# Altium PCB FRONT_v1.PcbDoc (part 5 of 5)
Units mm, origin at the board's own origin, x right, y up, seen from the top; angles counter-clockwise.
Board outline 100 x 68 mm, 4 copper layers (Top Layer, Layer 1, Layer 2, Bottom Layer), stack 1.484 mm thick; 320 components, 276 nets, 1432 pads, 1421 vias.
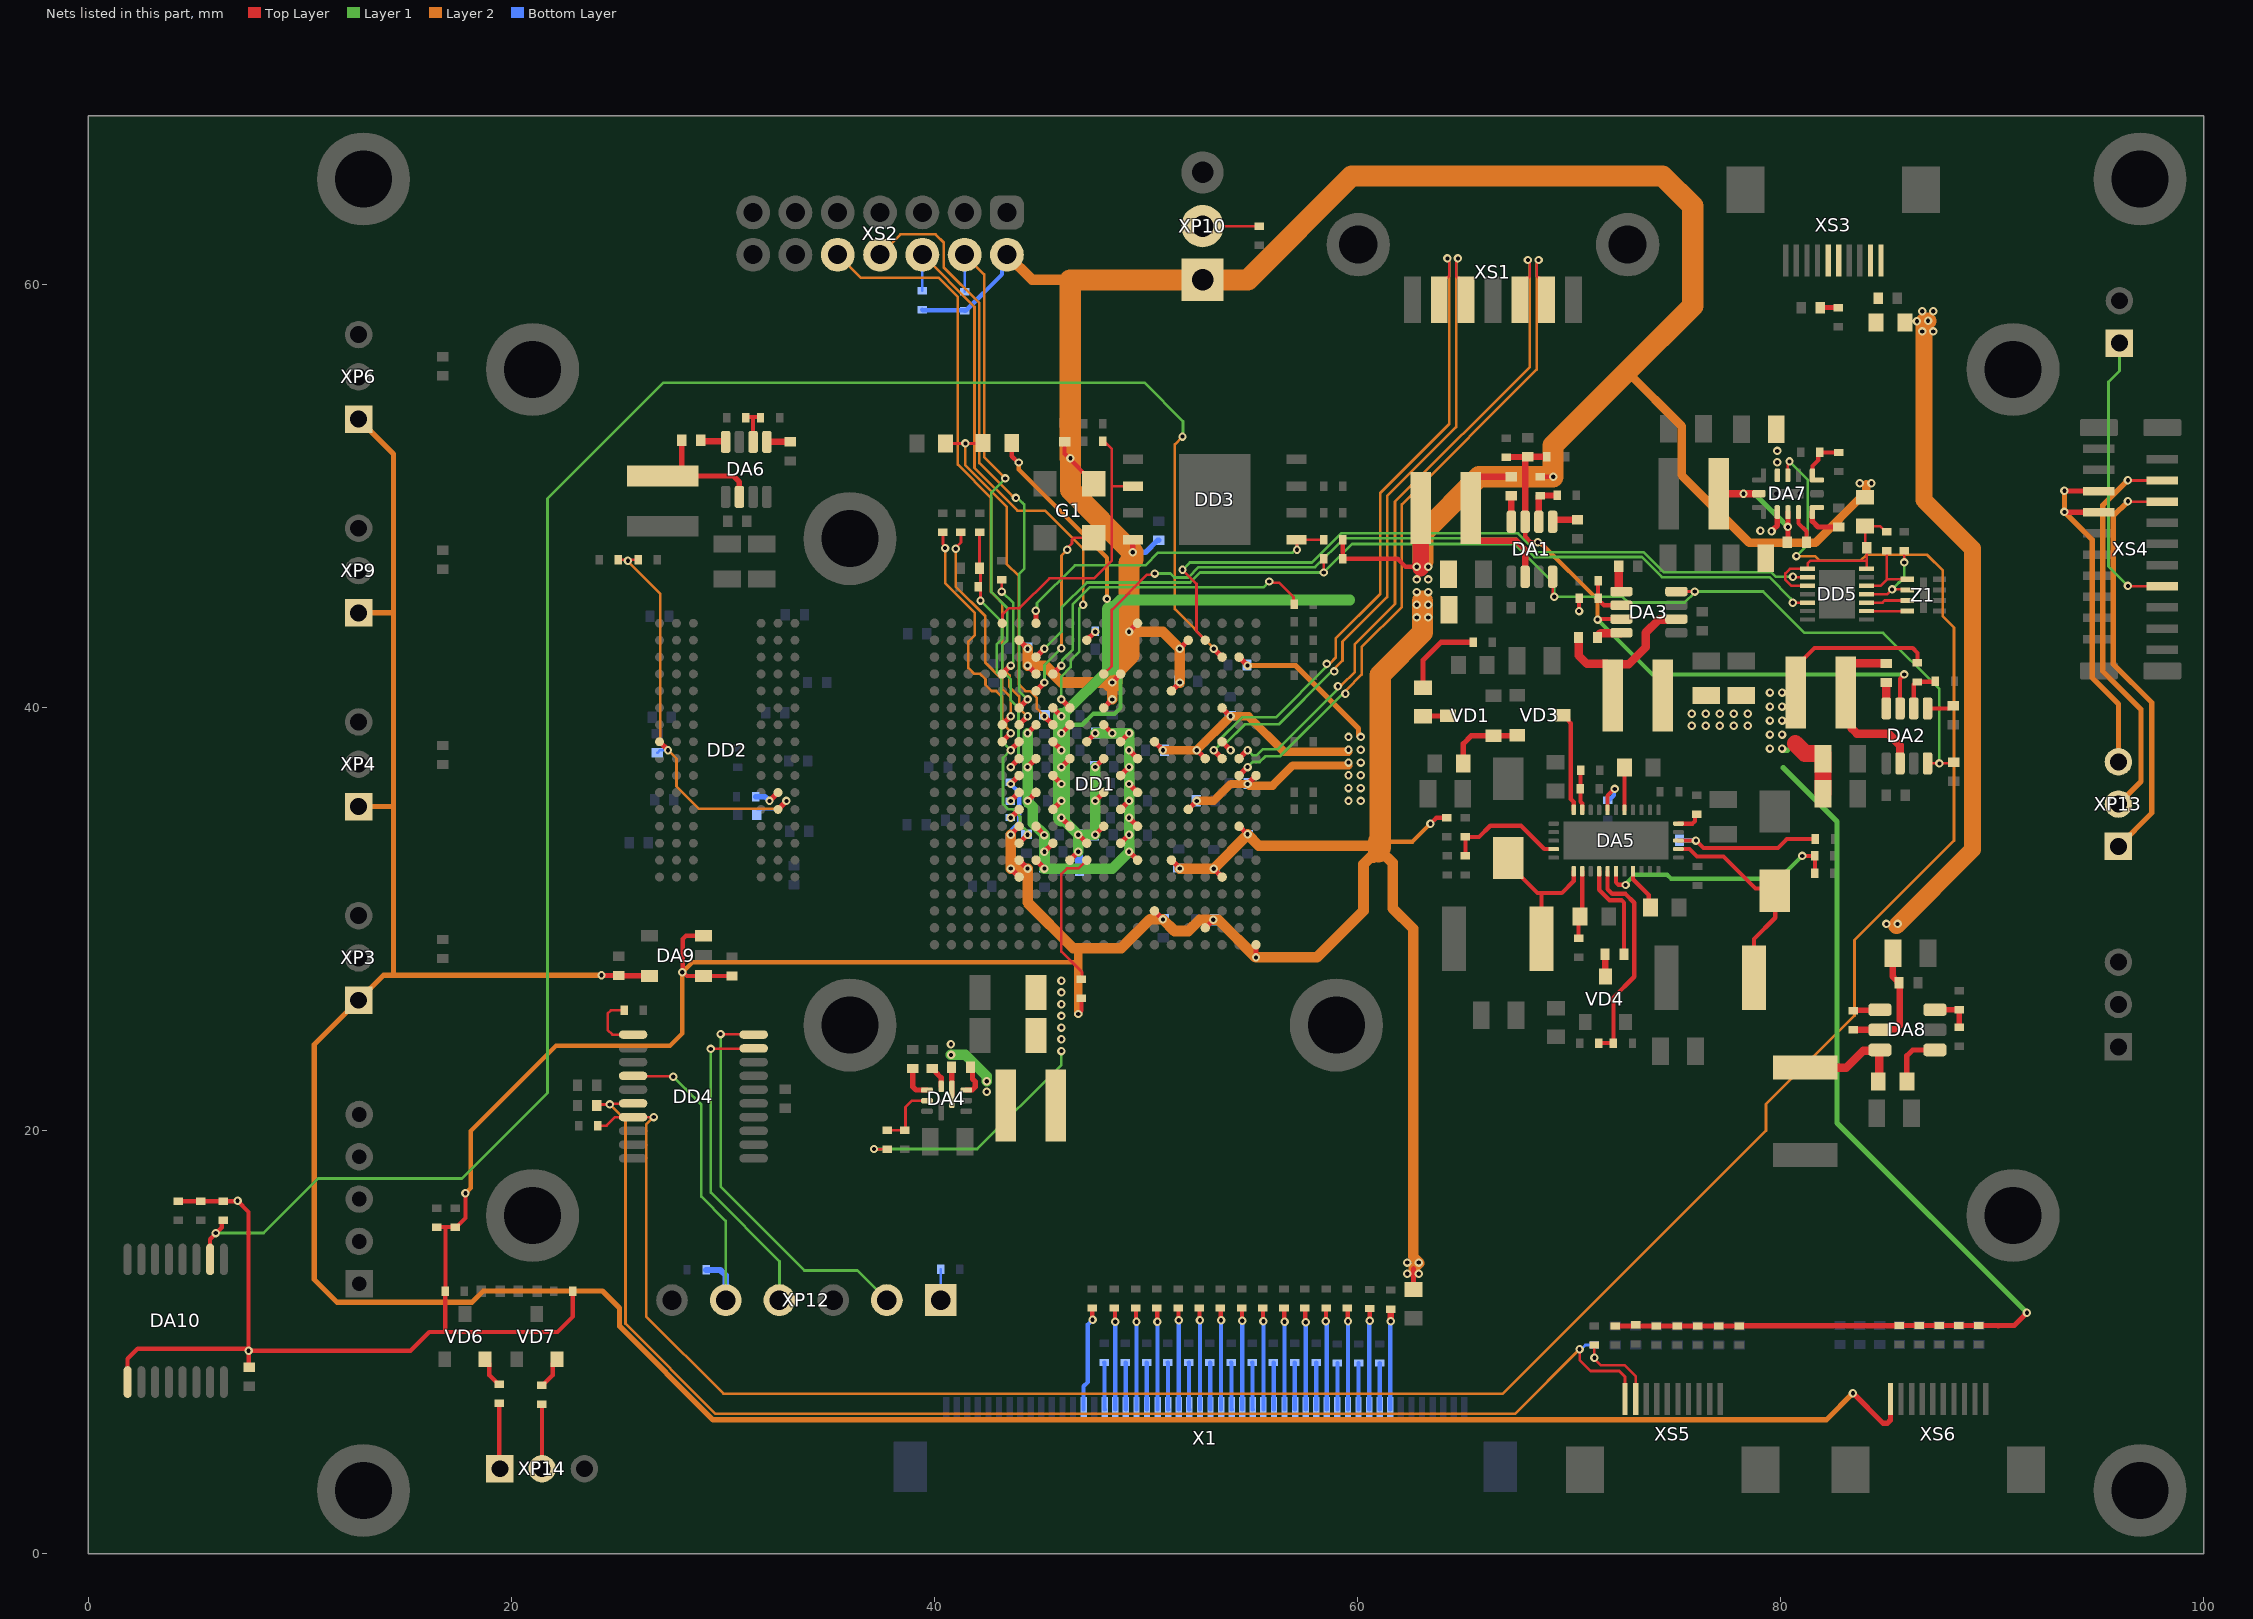
[diagram p6: the nets of this part, all layers, seen from the top]

## Via types
v1: diameter 0.4, hole 0.2, Top Layer to Bottom Layer, tented both sides, 837 vias
v2: diameter 0.8, hole 0.4, Top Layer to Bottom Layer, tented both sides, 558 vias
v3: diameter 0.8, hole 0.4, Top Layer to Bottom Layer, 12 vias
v4: diameter 0.5, hole 0.3, Top Layer to Bottom Layer, 10 vias
v5: diameter 0.5, hole 0.2, Top Layer to Bottom Layer, 4 vias

## Nets (pads, with @x,y where several pads share a name; then routed paths per layer and width w, separated by ;. In a path a pad name is that pad's centre, name@x,y a point inside that pad or via, vN(x,y) a via of type N, cw(c..) or ccw(c..) an arc to the next point about the centre after c; other vN are vias at no path point) (continued)
MIO6: DD1.A5 DD3.6 R89.1 | length 13.4
  Top Layer w0.125: DD1.A5@43.2,44 43.213,44.013 43.213,44.412 43.513,44.713 44.026,44.713 45.44,46.127 47.538,46.127 48.387,46.976 48.387,50.48 ; R89.1@47.95,52.55 R89.1@47.95,52.6 ; R89.1@48.05,52.575 48.387,52.238 48.387,50.48 ; DD3.6@49.38,50.485 48.392,50.485 48.387,50.48
NetC1_1: C1.1 DA1.8 | length 1.2
  Top Layer w0.3: DA1.8@67.275,48.8 C1.1@67.275,50.025
NetC1_2: C1.2 DA1.2 L1.2 | length 8.6
  Top Layer w0.3: C1.2@67.275,50.925 65.7,50.925 65.36,50.585 L1.2@65.36,49.45 65.36,48.24 65.7,47.9 67.5,47.9 67.925,47.475 DA1.2@67.925,46.2
NetC3_2: C3.2 DA1.5 | length 1.2
  Top Layer w0.3: DA1.5@69.225,48.8 69.225,48.825 69.3,48.9 C3.2@70.4,48.9
NetC6_1: C6.1 DA2.8 | length 1.2
  Top Layer w0.4: DA2.8@85,39.975 C6.1@85,41.2
NetC6_2: C6.2 DA2.2 L2.2 | length 8.4
  Top Layer w0.4: C6.2@85,42.1 83.375,42.1 83.085,41.81 83.375,41.52 83.375,39.017 83.609,38.783 85.092,38.783 85.65,38.225 DA2.2@85.65,37.375
NetC8_2: C8.2 DA2.5 | length 1.3
  Top Layer w0.2: DA2.5@86.95,39.975 88,39.975 88.125,40.1 C8.2@88.175,40.1
NetC11_1: C11.1 DA3.8 | length 1.2
  Top Layer w0.4: C11.1@71.35,43.325 71.35,43.375 71.5,43.525 72.45,43.525 DA3.8@72.475,43.55
NetC11_2: C11.2 DA3.2 L3.2 | length 8.8
  Top Layer w0.4: C11.2@70.45,43.325 70.45,42.475 70.85,42.075 71.775,42.075 72.065,41.785 L3.2@72.065,41.302 ; L3.2@72.065,40.575 L3.2@72.065,41.302 ; DA3.2@75.075,44.2 75.05,44.175 74.25,44.175 73.625,43.55 73.625,42.862 72.821,42.058 72.355,42.058 72.065,41.768 L3.2@72.065,41.302
NetC12_2: C12.2 DA1.7 DA2.7 DA3.7 R1.2 R7.2 | length 29.8
  Top Layer w0.2: DA1.7@67.925,48.8 67.929,48.796 67.929,48.096 68.209,47.816 v1@68.515,47.816 ; v1(71.35,44.175) 71.375,44.2 DA3.7@72.475,44.2 ; DA2.7@85.65,39.975 85.65,41.375 v1@85.85,41.575
  Top Layer w0.3: R7.2@67.025,51.85 67.037,51.862 68.037,51.862 C12.2@68.05,51.875 ; DA1.7@67.925,48.8 67.925,51.8 68,51.875 C12.2@68.05,51.875 ; R1.2@68.95,51.875 C12.2@68.05,51.875
  Layer 1 w0.2: v1(71.35,44.175) 73.945,41.58 v1(85.852,41.58)
  Layer 2 w0.2: v1(68.525,47.825) 68.579,47.825 68.675,47.729 68.736,47.729 71.35,45.116 v1(71.35,44.175)
NetC14_2: C14.2 DA3.5 | length 1.3
  Top Layer w0.4: C14.2@72.35,46.7 72.35,45.525 72.375,45.5 DA3.5@72.475,45.5
NetC17_1: C17.1 DA4.7 | length 1.5
  Top Layer w0.25: DA4.7@41.495,21.929 41.779,21.929 41.925,22.075 41.925,22.325 41.795,22.455 41.795,22.905 C17.1@41.7,23
NetC17_2: C17.2 DA4.8 L4.2 | length 3.6
  Top Layer w0.25: C17.2@40.8,23 40.82,22.98 DA4.8@40.82,21.729
  Layer 1 w0.5: v1(40.781,23.592) 41.458,23.592 42.475,22.575 v1(42.475,22.35)
  other v1: 42.475,21.85 40.775,24.1
NetC18_1: C18.1 C19.2 DD1.G8 L5.2 | length 16.9
  Top Layer w0.125: C19.2@40.525,52.5 42.27,52.5 L5.2@42.295,52.525
  Top Layer w0.25: v1(45.2,39.6) DD1.G8@45.6,39.2
  Layer 2 w0.125: v1(41.463,52.5) 41.463,51.463 43.413,49.512 43.413,46.812 43.987,46.238 43.987,41.1 44.3,40.788 44.525,40.788 44.837,40.475 44.837,39.962 v1(45.2,39.6)
NetC26_2: C26.2 DA4.1 | length 1.6
  Top Layer w0.25: C26.2@38.975,22.95 38.975,22.075 39.121,21.929 DA4.1@39.645,21.929
NetC27_2: C27.2 DA4.9 | length 1
  Top Layer w0.25: C27.2@39.9,22.95 39.95,22.95 40.045,22.855 40.045,22.78 40.32,22.505 DA4.9@40.32,22.104
NetC58_1: C58.1 R21.1 | length 4
  Top Layer w0.25: C58.1@63.1,40.95 63.1,42.25 63.95,43.1 R21.1@65.475,43.1
NetC58_2: C58.2 VD1.1 | length 1.2
  Top Layer w0.25: C58.2@63.1,39.6 63.113,39.612 64.262,39.612 VD1.1@64.275,39.625
NetC59_2: C59.2 DA5.2 R28.2 | length 3.2
  Top Layer w0.2: R28.2@70.45,29.1 70.45,30.05 C59.2@70.525,30.125 70.625,30.225 DA5.2@70.625,32.275
NetC60_1: C60.1 VD1.2 VD3.3 | length 3.6
  Top Layer w0.25: C60.1@65,37.375 65,38.3 65.375,38.675 VD1.2@66.425,38.675 66.437,38.687 67.537,38.687 VD3.3@67.55,38.7
NetC62_1: C62.1 DA5.4 | length 4.7
  Top Layer w0.2: DA5.4@71.425,32.275 71.425,31.401 71.919,30.907 72.483,30.907 72.6,30.79 C62.1@72.6,28.35
NetC62_2: C62.2 VD4.1 | length 1.1
  Top Layer w0.3: C62.2@71.7,28.35 71.713,28.338 71.713,27.313 VD4.1@71.725,27.3
NetC63_2: C63.2 DA5.8 | length 2.1
  Top Layer w0.2: DA5.8@73.025,32.275 73.025,31.9 73.767,31.158 73.767,30.633 C63.2@73.85,30.55
NetC65_2: C65.2 DA5.21 | length 2
  Top Layer w0.2: DA5.21@72.625,35.175 C65.2@72.625,37.175
NetC66_2: C66.2 DA5.14 R52.2 | length 7.6
  Top Layer w0.2: DA5.14@75.175,33.725 v1(76,33.725) 76.007,33.725 76.357,33.375 79.875,33.375 80.3,33.8 R52.2@81.65,33.8
  Bottom Layer w0.2: C66.2@75.225,33.75 75.238,33.738 75.988,33.738 v1(76,33.725)
NetC69_2: C69.2 C70.2 DD2.H1 DD2.M8 R67.1 R69.1 | length 21.4
  Top Layer w0.125: R67.1@25.125,47 R69.1@25.85,47
  Top Layer w0.25: DD2.H1@27,38.4 v1(27.4,38) ; DD2.M8@32.6,35.2 v1(33,35.6)
  Layer 2 w0.125: v1@25.525,46.975 v1(25.506,46.956) 25.487,46.937 27.037,45.387 27.037,38.363 v1(27.4,38) 27.8,37.6 27.8,36.287 28.85,35.237 32.637,35.237 v1(33,35.6)
  Bottom Layer w0.125: C69.2@26.896,37.872 27.024,38 v1(27.4,38) ; C70.2@31.625,35.2 32.6,35.2 v1(33,35.6)
NetC79_1: C79.1 DA6.8 | length 1.2
  Top Layer w0.3: C79.1@28.95,52.65 28.988,52.612 30.088,52.612 DA6.8@30.125,52.575
NetC79_2: C79.2 DA6.2 L9.2 | length 5.4
  Top Layer w0.25: C79.2@28.05,52.65 28.05,51.085 27.925,50.96 30.035,50.96 30.037,50.962 30.488,50.962 30.775,50.675 DA6.2@30.775,49.975
NetC89_2: C89.2 DA6.5 | length 1.1
  Top Layer w0.3: DA6.5@32.075,52.575 C89.2@33.175,52.575
NetC92_2: C92.2 C93.2 DD1.H6 DD1.P6 R73.2 R75.2 | length 17
  Top Layer w0.125: C93.2@42.125,46.6 42.125,48.275 R73.2@42.15,48.3 ; v1(42.175,45.075) 42.175,45.725 C93.2@42.175,46.6
  Top Layer w0.25: v1(43.6,38) DD1.H6@44,38.4 ; DD1.P6@44,33.6 v1(44.4,34)
  Layer 1 w0.125: v1@42.175,45.069 43.192,44.052 43.192,43.255 42.941,43.003 42.941,41.697 43.163,41.475 43.163,38.437 v1(43.6,38) 43.237,37.637 43.237,35.45 43.487,35.2 43.713,35.2 44.042,34.871 44.042,34.496 44.347,34.19 44.347,34.053 v1(44.4,34)
NetC102_1: C102.1 DA7.4 | length 1.6
  Top Layer w0.2: DA7.4@80.85,49.255 80.85,48.725 81.225,48.35 C102.1@81.225,47.825
NetC102_2: C102.2 DA7.3 DA7.12 L10.2 | length 6.1
  Top Layer w0.25: C102.2@80.325,47.825 80.35,47.85 v1(80.35,48.553) DA7.3@80.35,49.255
  Top Layer w0.35: L10.2@77.085,50.125 v1(78.25,50.125) DA7.12@78.975,50.125
  Layer 1 w0.25: v1(78.25,50.125) 78.279,50.096 78.806,50.096 v1(80.35,48.553)
NetC103_2: C103.2 C104.2 C111.1 C112.1 DA7.2 DA7.10 DA8.5 L11.1 R96.1 | length 38.1
  Top Layer w0.25: v1(79.575,48.35) 79.575,48.364 79.661,48.45 79.675,48.45 79.85,48.625 DA7.2@79.85,49.255
  Top Layer w0.3: R96.1@83.45,24.775 DA8.5@84.7,24.775 84.733,24.808 85.466,24.808 85.642,24.983 85.642,26.958 C112.1@85.6,27 ; C111.1@85.325,28.4 85.301,28.376 85.301,27.296 85.476,27.12 85.53,27.12 C112.1@85.58,27.07
  Top Layer w0.4: C112.1@85.58,27.07 85.6,27.05 C112.1@85.6,27
  Layer 2 w0.8: v1@85.475,29.7 89.075,33.3 89.075,47.525 86.785,49.815 86.785,58.273 86.812,58.3 v1(86.975,58.3)
  other v1: 85.008,29.783 85.533,29.783 79.05,48.375 79.85,51.611 79.85,52.15 86.7,57.8 87.225,57.8 86.45,58.275 86.7,58.75 87.225,58.75
NetC105_2: C105.2 DA7.5 | length 1.8
  Top Layer w0.25: DA7.5@81.505,49.25 81.505,48.821 81.776,48.55 C105.2@82.75,48.55
NetC108_2: C108.2 L11.2 XS3.1 XS3.2
NetC109_2: C109.2 R95.2 XS3.5 XS3.6 | length 0.9
  Top Layer w0.25: C109.2@81.875,58.925 R95.2@82.725,58.925
NetC110_1: C110.1 DA8.1 | length 2.7
  Top Layer w0.25: C110.1@85.975,22.325 85.975,23.55 86.25,23.825 DA8.1@87.3,23.825
NetC110_2: C110.2 DA8.6 L12.2 | length 5.4
  Top Layer w0.4: L12.2@81.175,22.995 83.116,22.995 83.917,23.797 84.672,23.797 DA8.6@84.7,23.825 84.663,23.788 84.663,22.363 C110.2@84.625,22.325
NetC124_2: C124.2 DD5.1 DD5.3 DD5.14 L13.1 R18.2 | length 8.9
  Top Layer w0.125: DD5.3@81.28,45.775 80.501,45.775 80.225,46.051 80.225,46.352 80.448,46.575 DD5.1@81.28,46.575 81.28,46.83 81.4,46.95 84.075,46.95 ; DD5.14@84.07,46.575 84.075,46.58 84.075,46.95 ; R18.2@85.025,48.325 84.975,48.325 84.705,48.595 L13.1@84,48.595 84,47.65 C124.2@84.075,47.575 84.075,46.95
NetDA1_6: DA1.6 R2.2 R3.1 | length 2.1
  Top Layer w0.3: DA1.6@68.575,48.8 68.575,50 68.6,50.025 R2.2@68.65,50.025 68.662,50.037 69.437,50.037 R3.1@69.45,50.05
NetDA2_6: DA2.6 R4.2 R5.1 | length 2.2
  Top Layer w0.2: DA2.6@86.3,39.975 86.3,41.1 86.425,41.225 R4.2@86.475,41.225 86.487,41.237 87.312,41.237 R5.1@87.325,41.25
NetDA3_6: DA3.6 R6.2 R8.1 | length 2
  Top Layer w0.2: R6.2@71.375,45.125 71.65,44.85 DA3.6@72.475,44.85 ; R6.2@71.375,45.175 R8.1@71.375,46
NetDA4_2: DA4.2 R9.2 R10.2 | length 3.1
  Top Layer w0.125: R9.2@37.775,20.025 R10.2@38.6,20.025 38.629,20.054 38.629,21.129 38.929,21.429 DA4.2@39.645,21.429
NetDA5_1: DA5.1 L6.1 VD2.2 | length 6.8
  Top Layer w0.2: VD2.2@67.125,32.9 67.125,32.625 67.75,32 67.756,32 68.506,31.25 68.675,31.25 ; L6.1@68.695,29.075 68.695,31.23 68.675,31.25 ; DA5.1@70.225,32.275 70.225,31.813 69.662,31.25 68.675,31.25
NetDA5_5: DA5.5 R27.2 R32.2 | length 10.1
  Top Layer w0.2: R27.2@71.4,24.15 R32.2@72.1,24.15 72.1,26.3 73.085,27.285 73.085,30.788 72.666,31.207 72.043,31.207 71.825,31.425 DA5.5@71.825,32.275
NetDA5_6: DA5.6 R36.2 R39.2 | length 11.5
  Top Layer w0.2: DA5.6@72.225,32.275 72.225,31.75 72.342,31.633 72.667,31.633 v1(72.675,31.625) ; v1(81.025,33) R36.2@81.625,33 R39.2@81.625,32.175
  Layer 1 w0.2: v1(72.675,31.625) 72.675,31.678 73.101,32.104 74.646,32.104 74.825,31.925 79.946,31.925 v1@81.021,33
NetDA5_13: DA5.13 L7.1 VD5.2 | length 10
  Top Layer w0.2: DA5.13@75.175,33.325 75.7,33.325 76.05,32.975 77.3,32.975 78.817,31.458 79.617,31.458 VD5.2@79.725,31.35 79.6,31.225 79.75,31.075 79.75,30.075 78.745,29.07 L7.1@78.745,27.25
NetDA5_16: DA5.16 R61.2 | length 1.2
  Top Layer w0.2: DA5.16@75.175,34.525 75.841,34.525 75.959,34.642 75.959,34.9 76.034,34.975 R61.2@76.05,34.975
NetDA5_23: DA5.23 R51.2 | length 1.8
  Top Layer w0.2: DA5.23@71.825,35.175 71.825,35.85 v1@72.15,36.175
  Bottom Layer w0.2: R51.2@71.825,35.625 71.85,35.65 71.9,35.65 72.12,35.87 72.12,36.129 v1(72.158,36.167)
NetDA5_26: DA5.26 R22.2 R30.2 | length 1.8
  Top Layer w0.2: R22.2@70.525,36.175 70.538,36.188 70.538,37.038 R30.2@70.55,37.05 ; R22.2@70.54,36.05 70.54,35.562 70.625,35.477 DA5.26@70.625,35.175
NetDA5_27: DA5.27 VD3.1 | length 4.7
  Top Layer w0.2: VD3.1@69.7,39.65 69.775,39.65 69.975,39.45 69.975,39.375 70.082,39.268 70.082,35.692 70.225,35.548 DA5.27@70.225,35.175
NetDA5_31: DA5.31 R25.2 R33.1 | length 5.7
  Top Layer w0.2: R33.1@65.1,33 R25.2@65.1,33.9 65.75,33.9 66.275,34.425 67.728,34.425 68.828,33.325 DA5.31@69.275,33.325
NetDA6_6: DA6.6 R71.2 R72.1 | length 1.9
  Top Layer w0.2: R72.1@31.075,53.725 31.1,53.75 31.425,53.75 ; DA6.6@31.425,52.575 31.425,53.75 ; R71.2@31.775,53.725 31.75,53.75 31.425,53.75
NetDA7_7: DA7.7 R92.2 R93.1 | length 2.1
  Top Layer w0.2: DA7.7@81.505,50.995 81.506,50.996 81.506,51.431 81.788,51.713 81.788,52.013 R92.2@81.85,52.075 R93.1@82.75,52.075
NetDA8_3: DA8.3 R97.2 R98.2 | length 2
  Top Layer w0.25: DA8.3@87.3,25.725 R98.2@88.45,25.725 R97.2@88.45,24.9
NetDA8_4: DA8.4 R96.2 | length 1.3
  Top Layer w0.25: R96.2@83.45,25.675 83.475,25.7 84.675,25.7 DA8.4@84.7,25.725
"NetDD1_A7   ": DD1.A7 DD3.1 R84.1 | length 16.1
  Top Layer w0.125: v1(57.139,47.479) 57.139,47.926 DD3.1@57.12,47.945 58.395,47.945 R84.1@58.4,47.95
  Top Layer w0.25: DD1.A7@44.796,44.004 v1@44.796,44.589
  Layer 1 w0.125: v1(44.792,44.592) 44.845,44.645 44.845,44.952 46.632,46.739 49.971,46.739 50.57,47.338 56.928,47.338 57.069,47.479 v1(57.139,47.479)
"NetDD1_B10  ": DD1.B10 R77.1 | length 0.6
  Top Layer w0.25: DD1.B10@47.2,43.2 v1(47.6,43.6)
"NetDD1_E7   ": DD1.E7 G1.3 | length 8.9
  Top Layer w0.125: v1(46.275,47.475) 46.275,47.549 46.499,47.774 46.499,47.957 46.588,48.045 47.52,48.045 G1.3@47.525,48.05
  Top Layer w0.25: DD1.E7@44.8,40.8 v1(45.2,41.2)
  Layer 1 w0.125: v1(45.2,41.2) 45.2,42.017 v1(46.003,42.819)
  Layer 2 w0.125: v1(46.003,42.819) 46.003,47.199 46.275,47.472 v1(46.275,47.475)
"NetDD1_F6   ": DD1.F6 XS2.8 | length 27.7
  Top Layer w0.25: DD1.F6@44,40 v1(44.4,40.4)
  Layer 1 w0.125: v1(43.85,49.925) 43.924,49.925 44.149,49.701 ; 44.149,49.701 44.238,49.612 44.238,46.569 44,46.331 44,40.8 v1(44.4,40.4)
  Layer 2 w0.125: XS2.8@37.425,61.425 38.388,62.387 40.053,62.387 40.438,62.003 40.438,60.829 42.117,59.15 42.117,51.57 43.657,50.03 43.67,50.03 43.776,49.925 v1(43.85,49.925)
"NetDD1_F9   ": DD1.F9 R79.1 XS2.6 | length 27.6
  Top Layer w0.25: v1(46,40.4) DD1.F9@46.4,40
  Layer 1 w0.125: v1(46,40.4) 46,41.487 46.437,41.925 46.437,42.262 46.85,42.674 46.85,44.7 v1(47.025,44.875)
  Layer 2 w0.125: XS2.6@39.425,61.425 41.892,58.958 41.892,51.351 43.921,49.322 45.236,49.322 47.025,47.533 v1(47.025,44.875)
  Bottom Layer w0.125: R79.1@39.425,59.725 XS2.6@39.425,61.425
"NetDD1_G5   ": DD1.G5 R74.1 | length 10.4
  Top Layer w0.125: v1(41,47.525) 41,47.573 41.25,47.823 R74.1@41.25,48.3
  Top Layer w0.25: DD1.G5@43.2,39.2 v1(43.6,39.6)
  Layer 2 w0.125: v1(41,47.525) 41,45.737 42.4,44.337 42.4,42.148 43.198,41.35 43.198,40.906 43.6,40.504 v1(43.6,39.6)
"NetDD1_G6   ": DD1.G6 XS2.10 | length 28.3
  Top Layer w0.25: DD1.G6@44,39.2 v1(44.4,39.6)
  Layer 2 w0.125: XS2.10@35.425,61.425 36.521,60.329 40.202,60.329 41.1,59.432 41.1,51.507 42.675,49.932 42.675,45.487 43.2,44.962 43.2,41.887 43.548,41.539 43.548,40.995 44,40.544 44,40 v1(44.4,39.6)
"NetDD1_H5   ": DD1.H5 R76.2 | length 11.9
  Top Layer w0.125: R76.2@40.4,48.3 40.4,47.728 40.501,47.627 v1(40.501,47.553)
  Top Layer w0.25: DD1.H5@43.2,38.4 v1(43.6,38.8)
  Layer 2 w0.125: v1(40.501,47.553) 40.501,45.898 41.908,44.491 41.908,43.445 41.6,43.137 41.6,41.887 41.875,41.612 42.15,41.612 42.409,41.354 42.409,41.078 42.693,40.794 42.918,40.794 43.211,40.501 43.211,39.476 43.388,39.3 43.388,39.087 43.6,38.874 v1(43.6,38.8)
"NetDD1_J6   ": DD1.J6 R78.1 XS2.4 | length 28.5
  Top Layer w0.25: v1(43.6,37.2) DD1.J6@44,37.6
  Layer 1 w0.125: v1(43.35,50.85) 42.687,50.187 42.687,45.475 43.44,44.722 43.44,43.184 43.2,42.944 43.2,41.756 43.6,41.356 43.6,40.375 43.975,40 43.975,37.575 v1(43.6,37.2)
  Layer 2 w0.125: XS2.4@41.425,61.425 42.35,60.5 42.35,51.85 v1(43.35,50.85)
  Bottom Layer w0.125: R78.1@41.425,59.675 XS2.4@41.425,61.425
"NetDD1_L6   ": DD1.L6 R82.1 | length 0.6
  Top Layer w0.25: v1(43.6,35.6) DD1.L6@44,36
"NetDD1_M6   ": DD1.M6 R80.1 | length 0.6
  Top Layer w0.25: v1(43.6,34.8) DD1.M6@44,35.2
"NetDD1_R10  ": DD1.R10 R81.1 | length 6.8
  Top Layer w0.125: R81.1@46.975,27.225 46.975,27.5 46,28.475 46,32.148 46.264,32.412 46.812,32.412 DD1.R10@47.2,32.8
NetDD2_L8: DD2.L8 R70.2 | length 1.3
  Top Layer w0.25: v1(32.2,35.6) DD2.L8@32.6,36
  Bottom Layer w0.25: R70.2@31.541,35.804 31.984,35.804 32.188,35.6 v1(32.2,35.6)
NetDD4_1: DD4.1 R109.2 | length 2.9
  Top Layer w0.125: R109.2@25.324,25.699 24.699,25.699 24.55,25.55 24.55,24.775 24.775,24.55 DD4.1@25.75,24.55
NetDD4_4: DD4.4 R105.1 XP12.5 | length 15.7
  Top Layer w0.125: DD4.4@25.75,22.6 25.769,22.581 27.629,22.581 v1(27.648,22.562)
  Layer 1 w0.125: v1(27.648,22.562) 28.231,21.979 28.975,21.235 28.975,16.9 30.13,15.745 XP12.5@30.13,12
  Bottom Layer w0.3: R105.1@29.2,13.425 29.875,13.425 30.13,13.17 XP12.5@30.13,12
NetR23_1: R23.1 X1.8 | length 4.7
  Top Layer w0.3: v1(61.575,11) R23.1@61.575,11.575
  Bottom Layer w0.2: X1.8@61.55,6.825 v1@61.55,10.975
NetR24_1: R24.1 X1.9 | length 2.2
  Bottom Layer w0.2: X1.9@61.05,6.825 R24.1@61.05,9.025
NetR26_1: R26.1 X1.10 | length 4.7
  Top Layer w0.2: v1(60.575,11.025) R26.1@60.575,11.6
  Bottom Layer w0.2: X1.10@60.55,6.825 v1@60.55,11
NetR29_1: R29.1 X1.11 | length 2.2
  Bottom Layer w0.2: X1.11@60.05,6.825 R29.1@60.05,9.025
NetR31_1: R31.1 X1.12 | length 4.8
  Top Layer w0.2: R31.1@59.525,11.625 59.537,11.613 59.537,11.013 v1(59.55,11)
  Bottom Layer w0.2: X1.12@59.55,6.825 v1(59.55,11)
NetR34_1: R34.1 X1.13 | length 2.2
  Bottom Layer w0.2: X1.13@59.05,6.825 R34.1@59.05,9.025
NetR35_1: R35.1 X1.14 | length 4.8
  Top Layer w0.2: v1(58.5,11) 58.512,11.013 58.512,11.612 R35.1@58.525,11.625
  Bottom Layer w0.2: X1.14@58.55,6.825 v1@58.55,10.95
NetR37_1: R37.1 X1.15 | length 2.2
  Bottom Layer w0.2: X1.15@58.05,6.825 R37.1@58.05,9.05
NetR38_1: R38.1 X1.16 | length 4.8
  Top Layer w0.2: R38.1@57.5,11.625 57.525,11.6 57.525,10.975 v1(57.55,10.95)
  Bottom Layer w0.2: X1.16@57.55,6.825 v1(57.55,10.95)
NetR40_1: R40.1 X1.17 | length 2.2
  Bottom Layer w0.2: R40.1@57.025,9.05 57.037,9.037 57.037,6.838 X1.17@57.05,6.825
NetR41_1: R41.1 X1.18 | length 4.8
  Top Layer w0.2: R41.1@56.525,11.625 56.537,11.612 56.537,10.988 v1(56.55,10.975)
  Bottom Layer w0.2: X1.18@56.55,6.825 v1(56.55,10.975)
NetR42_1: R42.1 X1.19 | length 2.2
  Bottom Layer w0.2: R42.1@56.025,9.05 56.037,9.037 56.037,6.838 X1.19@56.05,6.825
NetR44_1: R44.1 X1.20 | length 4.8
  Top Layer w0.2: R44.1@55.523,11.625 55.537,11.612 55.537,11.013 v1(55.55,11)
  Bottom Layer w0.2: X1.20@55.55,6.825 v1(55.55,11)
NetR45_1: R45.1 X1.21 | length 2.2
  Bottom Layer w0.2: R45.1@55.025,9.05 55.037,9.037 55.037,6.838 X1.21@55.05,6.825
NetR47_1: R47.1 X1.22 | length 4.8
  Top Layer w0.2: R47.1@54.521,11.625 54.536,11.611 54.536,11.039 v1(54.55,11.025)
  Bottom Layer w0.2: X1.22@54.55,6.825 v1(54.55,11.025)
NetR50_1: R50.1 X1.23 | length 2.2
  Bottom Layer w0.2: R50.1@54.025,9.05 54.037,9.037 54.037,6.838 X1.23@54.05,6.825
NetR53_1: R53.1 X1.24 | length 4.9
  Top Layer w0.2: R53.1@53.519,11.625 53.535,11.61 53.535,11.065 v1(53.55,11.05)
  Bottom Layer w0.2: X1.24@53.55,6.825 v1@53.55,11.1
NetR54_1: R54.1 X1.25 | length 2.2
  Bottom Layer w0.2: R54.1@53.025,9.05 53.037,9.037 53.037,6.838 X1.25@53.05,6.825
NetR55_1: R55.1 X1.26 | length 4.8
  Top Layer w0.2: R55.1@52.517,11.625 52.534,11.609 52.534,11.066 v1(52.55,11.05)
  Bottom Layer w0.2: X1.26@52.55,6.825 v1(52.55,11.05)
NetR56_1: R56.1 X1.27 | length 2.2
  Bottom Layer w0.2: R56.1@52.025,9.05 52.037,9.037 52.037,6.838 X1.27@52.05,6.825
NetR57_1: R57.1 X1.28 | length 4.8
  Top Layer w0.2: R57.1@51.515,11.625 51.533,11.608 51.533,11.067 v1(51.55,11.05)
  Bottom Layer w0.2: X1.28@51.55,6.825 v1(51.55,11.05)
NetR58_1: R58.1 X1.29 | length 2.2
  Bottom Layer w0.2: R58.1@51.025,9.05 51.037,9.037 51.037,6.838 X1.29@51.05,6.825
NetR59_1: R59.1 X1.30 | length 4.8
  Top Layer w0.2: R59.1@50.513,11.625 50.527,11.611 50.527,10.99 v1(50.541,10.976)
  Bottom Layer w0.2: v1(50.541,10.976) 50.545,10.972 50.545,6.83 X1.30@50.55,6.825
NetR60_1: R60.1 X1.31 | length 2.2
  Bottom Layer w0.2: R60.1@50.025,9.05 50.037,9.037 50.037,6.838 X1.31@50.05,6.825
NetR62_1: R62.1 X1.32 | length 4.8
  Top Layer w0.2: R62.1@49.512,11.625 49.531,11.606 49.531,10.994 v1(49.55,10.975)
  Bottom Layer w0.2: X1.32@49.55,6.825 v1(49.55,10.975)
NetR63_1: R63.1 X1.33 | length 2.2
  Bottom Layer w0.2: R63.1@49.025,9.05 49.037,9.037 49.037,6.837 X1.33@49.05,6.825
NetR64_1: R64.1 X1.34 | length 4.8
  Top Layer w0.2: R64.1@48.51,11.625 48.53,11.605 48.53,10.995 v1(48.55,10.975)
  Bottom Layer w0.2: X1.34@48.55,6.825 v1(48.55,10.975)
NetR65_1: R65.1 X1.35 | length 2.2
  Bottom Layer w0.2: R65.1@48.025,9.05 48.038,9.037 48.038,6.837 X1.35@48.05,6.825
NetR66_1: R66.1 X1.37 | length 5
  Top Layer w0.2: R66.1@47.45,11.65 47.463,11.638 47.463,11.087 v1(47.475,11.075)
  Bottom Layer w0.2: X1.37@47.05,6.825 47.05,7.925 47.25,8.125 47.25,10.85 v1(47.475,11.075)
NetR85_2: R85.2 XP10.2 | length 2.7
  Top Layer w0.125: XP10.2@52.675,62.775 R85.2@55.35,62.775
NetR106_1: R106.1 XP12.1 | length 1.5
  Bottom Layer w0.125: XP12.1@40.29,12 40.3,12.01 R106.1@40.3,13.45
NetR118_1: R118.1 VD6.3 | length 1.5
  Top Layer w0.2: VD6.3@18.75,9.2 18.95,9 18.95,8.45 19.375,8.025 R118.1@19.425,8.025
NetR118_2: R118.2 XP14.1 | length 3.1
  Top Layer w0.2: R118.2@19.425,7.125 19.425,4.05 XP14.1@19.45,4.025
NetR119_1: R119.1 VD7.3 | length 1.6
  Top Layer w0.2: R119.1@21.425,7.975 21.475,7.975 21.95,8.45 21.95,9 VD7.3@22.15,9.2
NetR119_2: R119.2 XP14.2 | length 3.1
  Top Layer w0.2: R119.2@21.425,7.075 21.437,7.062 21.437,4.038 XP14.2@21.45,4.025
NetXP5_1: XP5.1 XS4.7 | length 13.7
  Top Layer w0.125: v1@96.425,45.75 XS4.7@98.05,45.75
  Layer 1 w0.125: XP5.1@96.025,57.25 96.025,55.938 95.504,55.417 95.504,46.684 v1(96.423,45.765)
NetXP13_1: XP13.1 XS4.15 | length 19.6
  Top Layer w0.125: v1@96.425,49.75 XS4.15@98.05,49.75
  Layer 2 w0.25: XP13.1@95.977,33.45 97.554,35.027 97.554,40.246 95.725,42.075 95.725,49.067 v1(96.423,49.765)
NetXP13_2: XP13.2 XS4.17 | length 18.6
  Top Layer w0.125: v1@96.425,50.75 XS4.17@98.05,50.75
  Layer 2 w0.25: XP13.2@95.977,35.45 97.045,36.518 97.045,39.931 95.231,41.745 95.231,49.573 v1(96.423,50.765)
NetXP13_3: XP13.3 XS4.14 XS4.16 | length 17.1
  Top Layer w0.25: v1@93.425,49.25 XS4.14@95.05,49.25 ; v1@93.425,50.25 XS4.16@95.05,50.25
  Layer 2 w0.25: v1(93.423,50.265) v1(93.423,49.265) 94.745,47.943 94.745,41.41 95.977,40.178 XP13.3@95.977,37.45
POR_B: C97.2 DA1.4 DA2.4 DA3.4 DD1.C7 R83.1 | length 56.6
  Top Layer w0.125: v1(58.4,46.4) R83.1@58.4,47.05 ; DA1.4@69.225,46.2 69.225,45.325 v1(69.3,45.25) ; DA3.4@75.075,45.5 v1(75.95,45.5) ; DA2.4@86.95,37.375 v1(87.513,37.375) 88.075,37.375 C97.2@88.2,37.5
  Top Layer w0.25: DD1.C7@44.8,42.4 v1(45.2,42.8)
  Layer 1 w0.125: v1(45.2,42.8) 46.012,43.613 46.012,44.738 47.2,45.925 52.086,45.925 52.561,46.4 v1(58.4,46.4) 59.75,47.75 67.425,47.75 69.3,45.875 v1(69.3,45.25) 72.54,45.25 72.811,44.979 75.467,44.979 75.95,45.462 v1(75.95,45.5) 79.181,45.5 81.131,43.55 84.85,43.55 87.513,40.887 v1(87.513,37.375)
PWR_EN: DA7.9 DD4.7 R94.1 | length 115.6
  Top Layer w0.125: R94.1@24.075,20.25 24.5,20.25 24.9,20.65 DD4.7@25.75,20.65 v1(26.725,20.65) ; DA7.9@80.35,50.995 80.35,51.575 v1(80.425,51.65)
  Layer 1 w0.125: v1(80.425,51.65) 81.291,50.784 81.291,47.716 v1(80.75,47.175)
  Layer 2 w0.125: v1(26.725,20.65) 26.365,20.29 26.365,11.225 30.015,7.575 66.875,7.575 79.312,20.012 79.312,21.262 83.5,25.45 83.5,29.025 84.587,30.112 84.712,30.238 88.2,33.725 88.2,43.8 87.675,44.325 87.675,46.5 86.938,47.238 84.059,47.238 83.784,46.962 81.844,46.962 81.631,47.175 v1(80.75,47.175)
PWR_KEY0: C115.2 DD4.6 R101.1 XS5.1 | length 65.4
  Top Layer w0.125: C115.2@24.025,21.2 24.075,21.25 v1(24.65,21.25) 24.675,21.275 25.725,21.275 DD4.6@25.75,21.3 ; v1(70.5,9.675) 70.5,9.175 71.025,8.65 72.375,8.65 72.65,8.375 XS5.1@72.65,7.325
  Layer 2 w0.125: v1(24.65,21.25) 25.391,20.509 25.391,10.884 29.65,6.625 67.45,6.625 v1(70.5,9.675)
  Bottom Layer w0.125: v1(70.5,9.675) 70.574,9.675 70.774,9.875 R101.1@71.2,9.875
PWR_KEY1: R103.2 XS5.2 | length 4
  Top Layer w0.125: R103.2@71.2,9.875 v1(71.2,9.275) 71.2,9.225 71.513,8.912 72.638,8.912 73.15,8.4 XS5.2@73.15,7.325
RS422A: DD5.12 R18.1 Z1.1 | length 3.4
  Top Layer w0.125: DD5.12@84.07,45.775 84.745,45.775 85.045,46.075 ; R18.1@85.025,47.425 85.025,46.075 Z1.1@85.985,46.075
RS422B: DD5.11 R19.2 Z1.2 | length 4.1
  Top Layer w0.125: DD5.11@84.07,45.375 85.05,45.375 v1(85.275,45.6) 85.96,45.6 Z1.2@85.985,45.575 ; v1(85.85,46.875) R19.2@85.85,47.425
  Layer 1 w0.125: v1(85.275,45.6) 85.85,46.175 v1(85.85,46.875)
RS422RX: DD1.B17 DD5.2 | length 34.9
  Top Layer w0.125: v1(51.725,46.525) 52.387,45.863 52.387,43.612 DD1.B17@52.8,43.2 ; v1@80.6,46.2 80.625,46.175 DD5.2@81.28,46.175
  Layer 1 w0.125: v1(51.725,46.525) 52.075,46.875 57.85,46.875 59.225,48.25 67.587,48.25 68.481,47.357 73.534,47.357 74.486,46.405 79.565,46.405 79.769,46.202 v1(80.588,46.202)
RS422TX: DD1.D11 DD5.5 | length 39
  Top Layer w0.125: DD1.D11@48,41.6 48.387,41.987 48.387,44.637 50.047,46.297 50.36,46.297 v1(50.413,46.35) ; v1(80.575,44.975) DD5.5@81.28,44.975
  Layer 1 w0.125: v1(50.413,46.35) 51.153,46.35 51.34,46.162 52.006,46.162 52.493,46.65 58,46.65 59.375,48.025 67.468,48.025 68.361,47.132 73.441,47.132 74.393,46.18 79.472,46.18 80.477,45.175 80.477,45.147 80.575,45.049 v1(80.575,44.975)
RS422Y: DD5.9 Z1.4 | length 1.9
  Top Layer w0.125: DD5.9@84.07,44.575 Z1.4@85.985,44.575
RS422Z: DD5.10 Z1.3 | length 2
  Top Layer w0.125: DD5.10@84.07,44.975 84.825,44.975 84.925,45.075 Z1.3@85.985,45.075
SERCLK_N: DD1.H18 XS1.5 | length 31.7
  Top Layer w0.125: v1(64.75,61.25) 64.75,61.176 64.662,61.088 64.662,60.411 64.736,60.337 64.798,60.337 65.135,60 XS1.5@65.135,59.3
  Top Layer w0.25: DD1.H18@53.6,38.4 v1(54,38)
  Layer 1 w0.125: v1(54,38) 53.969,38 53.762,38.207 53.762,38.311 54.677,39.225 56.283,39.225 58.727,41.669 58.851,41.669 v1(58.904,41.721)
  Layer 2 w0.125: v1(58.904,41.721) 58.956,41.774 58.956,41.898 59.293,42.235 59.293,43.134 61.4,45.24 61.4,50.015 64.662,53.278 64.662,61.088 64.75,61.176 v1(64.75,61.25)
SERCLK_P: DD1.J18 XS1.6 | length 31.7
  Top Layer w0.125: XS1.6@63.865,59.3 63.865,60 64.203,60.337 64.264,60.337 64.337,60.411 64.337,61.088 64.25,61.176 v1(64.25,61.25)
  Top Layer w0.25: v1(53.2,38) DD1.J18@53.6,37.6
  Layer 1 w0.125: v1(53.2,38) 53.231,38 53.437,38.207 53.437,38.445 54.542,39.55 56.149,39.55 58.497,41.899 58.497,42.022 v1(58.55,42.075)
  Layer 2 w0.125: v1(58.55,42.075) 58.603,42.128 58.726,42.128 58.968,42.37 58.968,43.268 61.075,45.375 61.075,50.15 64.337,53.412 64.337,61.088 64.25,61.176 v1(64.25,61.25)
SERDATA_N: DD1.J19 XS1.3 | length 32.5
  Top Layer w0.125: XS1.3@67.675,59.3 67.675,60 68.013,60.337 68.074,60.337 68.148,60.411 68.148,61.013 68.06,61.101 v1(68.06,61.175)
  Top Layer w0.25: DD1.J19@54.4,37.6 v1(54.8,38)
  Layer 1 w0.125: v1(54.8,38) 55.037,37.762 55.24,37.762 55.515,38.038 56.211,38.038 59.022,40.849 59.022,40.972 v1(59.075,41.025)
  Layer 2 w0.125: v1(59.075,41.025) 59.128,41.078 59.251,41.078 59.875,41.701 59.875,43.01 61.775,44.91 61.775,49.75 68.148,56.123 68.148,61.013 68.06,61.101 v1(68.06,61.175)
SERDATA_P: DD1.K19 XS1.2 | length 33.1
  Top Layer w0.125: v1(68.56,61.175) 68.56,61.101 68.473,61.013 68.473,60.411 68.546,60.337 68.608,60.337 68.945,60 XS1.2@68.945,59.3
  Top Layer w0.25: DD1.K19@54.4,36.8 v1(54.8,37.2)
  Layer 1 w0.125: v1(54.8,37.2) 55.037,37.437 55.375,37.437 55.65,37.713 56.346,37.713 59.252,40.619 59.376,40.619 v1(59.429,40.671)
  Layer 2 w0.125: v1(59.429,40.671) 59.481,40.724 59.481,40.848 60.2,41.567 60.2,42.875 62.1,44.775 62.1,49.615 68.473,55.988 68.473,61.013 68.56,61.101 v1(68.56,61.175)
STM32_SWCLK: DD4.20 XP12.2 | length 18.8
  Top Layer w0.125: v1(29.888,24.575) 29.901,24.563 31.437,24.563 DD4.20@31.45,24.55
  Layer 1 w0.125: v1@29.9,24.55 29.9,17.35 33.85,13.4 36.35,13.4 XP12.2@37.75,12
STM32_SWDIO: DD4.19 XP12.4 | length 15.3
  Top Layer w0.125: v1(29.425,23.875) 29.438,23.887 31.438,23.887 DD4.19@31.45,23.9
  Layer 1 w0.125: v1(29.425,23.875) 29.425,17.075 32.67,13.83 XP12.4@32.67,12
TCH_IRQ: DA10.10 DD1.C18 R124.1 | length 93.9
  Top Layer w0.2: DA10.10@5.75,13.925 5.75,14.877 6.3,15.426 6.3,15.7 R124.1@6.375,15.775
  Top Layer w0.25: v1(53.2,42.8) DD1.C18@53.6,42.4
  Layer 1 w0.125: v1(6.022,15.17) 8.283,15.17 10.863,17.75 17.657,17.75 21.7,21.793 21.7,49.889 27.187,55.375 49.925,55.375 51.75,53.55 51.75,52.85 v1(51.725,52.825)
  Layer 2 w0.125: v1(51.725,52.825) 51.363,52.463 51.363,44.668 53.2,42.831 v1(53.2,42.8)
VDD_1V0: C28.2 C29.2 C30.1 C31.1 C32.1 C33.1 C34.1 C38.1 C39.1 C40.1 C41.1 C42.1 C43.1 C44.1 C45.1 DD1.G7 DD1.G11 DD1.H10 DD1.H12 DD1.J7 DD1.J13 DD1.K12 DD1.L7 DD1.L13 DD1.M12 DD1.N7 DD1.N13 DD1.P8 DD1.P12 DD1.R7 DD1.R13 L4.1 R9.1 | length 39.9
  Top Layer w0.125: v1(37.14,19.143) 37.149,19.134 37.766,19.134 R9.1@37.775,19.125
  Top Layer w0.25: v1(44.4,37.2) DD1.J7@44.8,37.6 ; v1(44.4,38.8) DD1.G7@44.8,39.2 ; v1(44.41,35.6) 44.41,35.605 44.8,35.995 DD1.L7@44.8,36 ; DD1.R7@44.8,32.8 v1(45.2,32.4) ; DD1.N7@44.8,34.4 44.8,34.387 45.187,34 v1(45.187,33.987) ; v1(45.2,33.2) DD1.P8@45.6,33.6 ; DD1.H10@47.2,38.4 v1(47.6,38.8) ; DD1.G11@48,39.2 v1(48.4,38.8) ; DD1.P12@48.8,33.6 v1(49.2,34) ; DD1.M12@48.8,35.2 v1(49.2,35.6) ; DD1.K12@48.8,36.8 v1(49.2,37.2) ; DD1.H12@48.8,38.4 v1(49.2,38.8) ; v1(49.2,33.2) DD1.R13@49.6,32.8 ; v1(49.2,34.8) DD1.N13@49.6,34.4 ; v1(49.2,36.4) DD1.L13@49.6,36 ; v1(49.2,38) DD1.J13@49.6,37.6
  Layer 1 w0.125: v1(37.14,19.143) 42.018,19.143 46,23.125 v1(46,23.775)
  Layer 1 w0.5: v1@44.4,35.568 44.65,35.318 44.65,34.55 45.187,34.013 v1(45.187,33.987) ; v1(44.4,38.8) v1(44.4,37.2) 44.4,35.61 v1(44.41,35.6) ; v1@45.2,33.987 v1(45.2,33.2) v1(45.2,32.4) 48.4,32.4 v1(49.2,33.2) v1(49.2,34) v1(49.2,34.8) v1(49.2,35.6) v1(49.2,36.4) v1(49.2,37.2) v1(49.2,38) v1(49.2,38.8) v1(48.4,38.8) v1(47.6,38.8)
  Bottom Layer w0.2: C38.1@44.375,38.025 44.388,38.038 44.388,38.787 v1(44.4,38.8)
  other v1: 46,24.329 46,24.883 46,25.437 46,25.992 46,26.546 46,27.1
VDD_1V8: C15.2 C16.2 C20.1 C21.1 C22.1 C23.1 C24.1 C35.1 C36.1 C37.1 DD1.F8 DD1.G9 DD1.H8 DD1.J9 DD1.J11 DD1.K8 DD1.L11 DD1.M8 DD1.N9 DD1.N11 DD1.P10 DD1.R9 L3.1 L5.1 R6.1 | length 51
  Top Layer w0.2: L5.1@43.655,52.525 43.655,51.895 43.95,51.6 v1@43.975,51.6 ; v1(70.475,44.575) R6.1@70.475,45.175
  Top Layer w0.25: DD1.M8@45.6,35.2 v1(46,35.6) ; DD1.K8@45.6,36.8 v1(46,36.4) ; DD1.H8@45.6,38.4 v1(46,38) ; DD1.F8@45.6,40 v1(46,39.6) ; v1(46,34.8) DD1.N9@46.4,34.4 ; v1(46,37.2) DD1.J9@46.4,37.6 ; v1(46,38.8) DD1.G9@46.4,39.2 ; DD1.R9@46.4,32.8 v1(46.8,33.2) ; v1(46.8,34) DD1.P10@47.2,33.6 ; v1(47.6,34) DD1.N11@48,34.4 ; v1(47.6,35.6) DD1.L11@48,36 ; v1(47.6,37.2) DD1.J11@48,37.6
  Layer 1 w0.2: 46,39.2 46.988,39.2 47.513,39.725 48.525,39.725 48.8,40 48.8,41.45 48.325,41.925
  Layer 1 w0.5: v1(46,34.8) v1(46.8,34) ; v1(46,39.6) 48.325,41.925 ; v1(46.8,33.2) v1(46.8,34) ; v1(47.6,37.2) v1(47.6,35.6) v1(47.6,34) v1(46.8,34) ; 48.325,44.65 48.775,45.1 59.625,45.1
  Layer 1 w0.8: v1(46,34.8) v1(46,36.4) v1(46,38) 46,39.2 v1(46,39.6) ; 48.325,41.925 48.325,44.65
  Layer 2 w0.2: v1(43.981,51.601) 43.981,51.266 48.15,47.097 v1(48.15,45.15)
  Bottom Layer w0.4: v1(46.8,33.2) 46.832,33.168 46.832,32.35 C37.1@46.852,32.33
  other v1: 75.8,39.15 76.462,39.15 77.125,39.15 77.787,39.15 78.45,39.15 75.8,39.725 76.463,39.725 77.125,39.725 77.788,39.725 78.45,39.725
VDD_1V25: C49.2 DA9.5 XP3.1 XP4.1 XP6.1 XP9.1 XS6.1 | length 140
  Top Layer w0.125: v1(24.255,27.358) C49.2@25.23,27.358
  Top Layer w0.25: v1@24.25,27.35 C49.2@25.075,27.35 25.088,27.337 26.513,27.337 DA9.5@26.525,27.325 ; v1(83.425,7.6) 84.846,6.179 85.054,6.179 85.2,6.325 XS6.1@85.2,7.325
  Layer 2 w0.25: XP4.1@12.775,35.333 14.396,35.333 14.425,35.363 ; XP9.1@12.775,44.492 14.392,44.492 14.425,44.525 ; XP6.1@12.775,53.65 14.425,52 14.425,44.525 ; v1(24.255,27.358) 14.425,27.358 ; v1(83.425,7.6) 82.163,6.338 29.531,6.338 25.103,10.765 25.103,11.623 24.301,12.425 18.663,12.425 18.138,11.9 11.75,11.9 10.675,12.975 10.675,24.075 XP3.1@12.775,26.175 13.958,27.358 14.425,27.358 ; 14.425,27.358 14.425,35.363 ; 14.425,35.363 14.425,44.525
VDD_2V5: C9.2 C10.2 C134.2 C135.2 C136.2 C137.2 C138.2 DD1.C19 DD1.F18 DD1.H14 DD1.J17 DD1.K20 DD1.M16 L2.1 R4.1 R99.2 R100.2 R102.2 R104.2 R107.2 R108.2 R110.2 R111.2 R112.2 R113.2 R114.2 R115.2 | length 90.3
  Top Layer w0.2: L2.1@80.715,40.725 80.715,41.935 81.605,42.825 86.25,42.825 86.475,42.6 R4.1@86.475,42.125
  Top Layer w0.25: DD1.H14@50.4,38.4 v1(50.8,38) ; DD1.M16@52,35.2 v1(52.4,35.6) ; v1(52.4,38) DD1.J17@52.8,37.6 ; DD1.F18@53.6,40 v1(54,39.6) ; DD1.C19@54.4,42.4 v1(54.8,42) ; v1(54.8,36.4) DD1.K20@55.2,36.8 ; R100.2@72.179,10.775 R104.2@74.136,10.775 R107.2@75.114,10.775 R108.2@76.093,10.775 R110.2@77.071,10.775 R99.2@78.05,10.775 78.063,10.788 85.613,10.788 R111.2@85.625,10.8 R112.2@86.562,10.8 R113.2@87.5,10.8 R114.2@88.437,10.8 R115.2@89.375,10.8 91.05,10.8 v1(91.65,11.4) ; 90.3,10.788 90.312,10.8
  Top Layer w0.8: 80.698,38.319 81.167,37.85 82,37.85 C10.2@82,37.6 82,37.35 C9.2@82,35.95
  Layer 1 w0.25: v1(80.075,38.075) 80.1,38.1 80.1,38.075 80.175,38 80.315,38 ; 80.125,37.175 82.675,34.625 82.675,20.375 v1(91.65,11.4)
  Layer 2 w0.25: v1(54.8,42) 57.075,42 60.05,39.025 60.05,38.7 60.125,38.625 v1@60.141,38.625
  Layer 2 w0.4: v1(50.8,38) v1(52.4,38) v1@53.982,39.582 ; v1(52.4,35.6) 53.2,35.6 54,36.4 v1(54.8,36.4) 54.875,36.325 55.982,36.325 56.932,37.275 v1@59.575,37.275 ; v1(54,39.6) 54.85,39.6 56.525,37.925 v1@59.575,37.925
  other v1: 59.575,35.6 60.15,35.6 59.575,36.205 60.15,36.205 59.575,36.81 60.15,36.81 59.575,37.415 60.15,37.415 59.575,38.02 60.15,38.02 79.5,38.075 59.575,38.625 60.15,38.625 79.5,38.738 80.075,38.737 79.5,39.4 80.075,39.4 79.5,40.063 80.075,40.062 79.5,40.725 80.075,40.725
VDD_3V3: C4.2 C5.2 C46.2 C94.2 C95.2 C96.2 C98.2 C99.2 C100.2 C101.2 C139.2 C140.2 C141.2 C142.2 C143.2 DA9.1 DA9.3 DA10.1 DD1.A13 DD1.B6 DD1.B16 DD1.D7 DD1.D12 DD1.E15 DD1.F11 DD1.K6 DD1.N6 DD1.N19 DD1.R6 DD1.R15 DD1.T6 DD1.T18 DD1.V14 DD1.W17 DD1.Y20 DD3.8 G1.4 L1.1 L8.2 L13.2 R2.1 R11.1 R12.1 R20.2 R43.1 R77.2 R78.2 R79.2 R80.2 R81.2 R82.2 R83.2 R84.2 R117.2 R122.2 R123.2 R124.2 XP10.1 XS2.2 | length 304
  Top Layer w0.2: DA10.1@1.85,8.125 1.85,9.225 2.325,9.7 7.458,9.7 7.575,9.583 7.575,8.85 C143.2@7.6,8.825 ; R122.2@4.25,16.675 R123.2@5.3,16.675 R124.2@6.375,16.675 v1@7.05,16.675 ; v1(7.047,16.693) 7.572,16.168 v1(7.572,9.601) 15.219,9.601 16.115,10.497 16.89,10.497 ; R12.1@16.475,15.45 16.913,15.45 ; R20.2@16.871,12.421 16.871,10.516 16.89,10.497 ; R20.2@16.875,12.425 16.875,15.412 16.913,15.45 ; v1(17.825,17.05) 17.825,15.875 17.4,15.45 R11.1@17.35,15.45 16.913,15.45 ; 22.178,10.497 16.89,10.497 ; 22.192,10.511 22.9,11.219 R117.2@22.9,12.425 ; DA9.3@29.075,29.225 28.25,29.225 28.1,29.075 28.1,27.525 28.3,27.325 DA9.1@29.075,27.325 C46.2@30.425,27.325 ; C95.2@46.15,52.575 46.15,52.015 47.525,50.64 G1.4@47.525,50.59 ; v1(46.8,25.525) 46.95,25.675 R81.2@46.95,26.275 ; R84.2@59.3,47.95 R83.2@59.3,47.05 61.9,47.05 62.275,46.675 v1(62.8,46.675) ; v1(63.45,34.525) 63.725,34.8 R43.1@64.225,34.8 ; R2.1@68.65,50.925 v1(69.25,50.925)
  Top Layer w0.25: v1(43.6,32.4) DD1.T6@44,32 ; v1(43.6,34) DD1.N6@44,34.4 ; v1(43.6,36.4) DD1.K6@44,36.8 ; DD1.R6@44,32.8 v1(44.4,32.4) ; DD1.B6@44,43.2 v1(44.4,42.8) ; v1(44.4,42) DD1.D7@44.8,41.6 ; DD1.F11@48,40 v1(48.4,40.4) ; v1(48.4,41.2) DD1.D12@48.8,41.6 ; v1(49.2,43.6) DD1.A13@49.6,44 ; v1(49.371,47.354) 49.371,47.936 DD3.8@49.38,47.945 ; DD1.V14@50.4,30.4 v1(50.8,30) ; DD1.R15@51.2,32.8 v1(51.6,32.4) ; DD1.E15@51.2,40.8 v1(51.6,41.2) ; v1(51.6,42.8) DD1.B16@52,43.2 ; DD1.W17@52.8,29.6 v1(53.185,29.985) ; v1(53.2,32.396) v1(53.2,32.396) 53.598,32 DD1.T18@53.6,32 ; DD1.N19@54.4,34.4 54.412,34.4 54.787,34.025 v1(54.8,34.025) ; v1(55.2,28.2) DD1.Y20@55.2,28.8 ; 62.6,13.175 62.625,13.15 ; L8.2@62.65,12.505 62.65,13.475
  Top Layer w0.8: v1@62.99,46.615 L1.1@62.99,49.45
  Layer 2 w0.2: v1(17.825,17.05) 18.075,17.3 18.075,20 22.1,24.025 27.5,24.025 28.075,24.6 v1(28.075,27.5) 28.55,27.975 46.8,27.975 ; v1@44.392,42.808 v1(44.4,42.8) ; 46.8,28.633 46.825,28.658 ; 60.993,33.482 61.186,33.675 62.6,33.675 v1(63.45,34.525)
  Layer 2 w0.4: v1(46.8,25.525) 46.8,27.975 46.8,28.633 ; 72.712,55.938 72.75,55.9 75.333,53.317 75.333,50.992 78.521,47.804 81.654,47.804 84.05,50.2 84.05,50.575
  Layer 2 w0.5: XS2.2@43.425,61.425 44.615,60.235 46.419,60.235 ; v1(43.6,34) v1(43.6,32.4) v1(44.4,32.4) 44.4,30.8 46.567,28.633 46.8,28.633 ; v1(44.4,42.8) v1(44.4,42) 45.222,42 46.022,41.2 v1(48.4,41.2) v1(48.4,40.4) ; 46.811,28.643 48.835,28.643 50.192,30 v1(50.8,30) 51.35,29.45 52,29.45 52.535,29.985 v1(53.185,29.985) 53.415,29.985 v1(55.2,28.2) 58.075,28.2 60.283,30.408 60.283,32.608 60.6,32.925 60.75,32.925 61.012,33.187 61.075,33.25 61.657,32.668 61.657,30.518 62.627,29.548 62.627,14.048 v1(62.9,13.775) ; v1(49.2,43.6) 50.8,43.6 v1(51.6,42.8) v1(51.6,41.2) ; v1(51.6,32.4) 53.196,32.4 53.198,32.398 v1(53.2,32.396) ; v1@53.2,32.4 54.8,34 v1(54.8,34.025) ; v1@54.821,34 55.339,33.482 60.993,33.482 ; 62.65,13.475 v1@62.925,13.75
  Layer 2 w1: v1@46.419,51.8 46.419,60.235 XP10.1@52.675,60.235 54.81,60.235 59.725,65.15 74.425,65.15 75.85,63.725 75.85,59.001 72.75,55.9 69.25,52.401 v1(69.25,50.925) 65.75,50.925 63.095,48.27 63.095,46.93 ; v1(46.425,51.8) 46.425,50.3 v1(49.371,47.354) 49.371,47.013 49.2,46.842 v1(49.2,43.6) 49.2,42.5 48.4,41.7 v1(48.4,41.2) ; 61,33.2 61,33.675 ; 61.075,33.4 61.075,41.56 63.075,43.56 63.075,45.05
  Bottom Layer w0.2: R79.2@39.425,58.825 39.45,58.8 41.4,58.8 R78.2@41.425,58.775 41.475,58.775 43.197,60.497 43.197,61.197 XS2.2@43.425,61.425 ; v1(43.6,34) 43.6,34.163 44.01,34.573 44.01,35.99 v1(43.6,36.4) ; C98.2@48.5,42.775 R77.2@48.5,43.625 48.513,43.612 49.188,43.612 v1(49.2,43.6)
  Bottom Layer w0.25: v1(49.371,47.354) 49.979,47.354 50.55,47.925 C96.2@50.6,47.925
  other v1: 62.35,13.25 62.9,13.25 62.35,13.775 62.8,44.275 63.35,44.275 62.8,44.875 63.35,44.875 62.8,45.475 63.35,45.475 62.8,46.075 63.35,46.075 63.35,46.675 83.75,50.625 84.3,50.625
VMODE0: DD1.D8 R90.1 | length 15.2
  Top Layer w0.125: v1(55.825,45.975) 55.878,45.922 56.288,45.922 56.971,45.239 56.971,44.929 R90.1@57,44.9
  Top Layer w0.25: DD1.D8@45.6,41.6 v1(46,42)
  Layer 1 w0.125: v1(46,42) 46.04,42.04 46.04,42.258 46.542,42.76 46.542,44.905 47.337,45.7 55.55,45.7 v1(55.825,45.975)
VMODE1: DD1.D5 R91.1 | length 4.9
  Top Layer w0.125: v1(43.175,45.5) R91.1@43.175,46.05
  Top Layer w0.25: DD1.D5@43.2,41.6 v1(43.6,42)
  Layer 1 w0.125: v1(43.175,45.5) 43.725,44.95 43.725,42.199 43.6,42.074 v1(43.6,42)
pads on no net: DA5.7 DA5.9 DA5.10 DA5.12 DA5.20 DA5.22 DA5.24 DA6.4 DA7.8 DA9.4 DA10.2 DA10.3 DA10.4 DA10.5 DA10.7 DA10.8 DA10.9 DA10.15 DA10.16 DD1.A9 DD1.A10 DD1.A11 DD1.A12 DD1.A17 DD1.B5 DD1.B9 DD1.B12 DD1.B13 DD1.B14 DD1.B15 DD1.C5 DD1.C6 DD1.C8 DD1.C10 DD1.C11 DD1.C12 DD1.C13 DD1.C15 DD1.C16 DD1.D9 DD1.D13 DD1.D14 DD1.D15 DD1.D16 DD1.D19 DD1.D20 DD1.E6 DD1.E8 DD1.E9 DD1.E11 DD1.E12 DD1.E13 DD1.E14 DD1.E16 DD1.F12 DD1.F13 DD1.F14 DD1.F15 DD1.F16 DD1.F17 DD1.F19 DD1.F20 DD1.G13 DD1.G14 DD1.G15 DD1.G17 DD1.G18 DD1.G19 DD1.G20 DD1.H15 DD1.H16 DD1.H17 DD1.J14 DD1.J15 DD1.J16 DD1.K9 DD1.L10 DD1.L15 DD1.L17 DD1.N17 DD1.N18 DD1.N20 DD1.P1 DD1.P3 DD1.P14 DD1.P16 DD1.P19 DD1.P20 DD1.R1 DD1.R2 DD1.R3 DD1.R11 DD1.R16 DD1.R17 DD1.R18 DD1.R19 DD1.T1 DD1.T2 DD1.T4 DD1.T5 DD1.T9 DD1.U2 DD1.U3 DD1.U4 DD1.U5 DD1.U7 DD1.U8 DD1.U9 DD1.U10 DD1.U17 DD1.V1 DD1.V2 DD1.V3 DD1.V5 DD1.V6 DD1.V7 DD1.V8 DD1.V10 DD1.V11 DD1.V18 DD1.W1 DD1.W3 DD1.W4 DD1.W5 DD1.W6 DD1.W8 DD1.W9 DD1.W10 DD1.W11 DD1.Y1 DD1.Y2 DD1.Y3 DD1.Y4 DD1.Y6 DD1.Y7 DD1.Y8 DD1.Y9 DD1.Y11 DD1.Y12 DD1.Y13 DD2.J1 DD2.J9 DD2.L1 DD2.L9 DD2.M7 DD4.2 DD4.3 DD4.10 DD4.11 DD4.12 DD4.13 DD4.14 DD4.17 DD4.18 DD5.7 DD5.13 G1.1 VD6.2 VD7.2 X1.45 X1.49 X1.50 X1.P1 X1.P2 XP12.6 XS2.12 XS2.14 XS3.0 XS3.3 XS3.4 XS3.7 XS3.8 XS4.0 XS4.12 XS4.13 XS4.18 XS4.19 XS5.0 XS6.0
copper on no net: | length 36.1
  Top Layer w0.2: 1,2.5 1,5.325 2.5,6.825 2.5,8.125 ; 2,2.5 2,5.4 3.15,6.55 3.15,8.125 ; 3,2.5 3,5.425 3.8,6.225 3.8,8.125 ; 4,2.5 4,5.475 4.45,5.925 4.45,8.125
  Top Layer w0.7: 1,1 1,4 ; 2,1 2,4 ; 3,1 3,4 ; 4,1 4,4

## Polygon pours and split planes (outlines as drawn)
GND on Layer 2 "GND_L03_P012" (solid, remove dead copper, pour order 12): 0,0 0.1,-0.1 100.05,-0.1 100.05,67.9 99.825,68.125 0,68.125
BL_PWR on Layer 2 "BL_PWR_L03_P006" (solid, remove dead copper, pour order 6): 62.219,20.45 62.219,18.025 42.325,18.025 40.95,18.025 40.95,18.575 42.825,20.45
BL_PWR on Layer 2 "BL_PWR_L03_P004" (solid, remove dead copper, pour order 4): 79.925,34.175 73.65,27.9 73.65,24.95 74.1,24.5 76.7,24.5 85.5,33.3 85.55,33.3 85.55,33.35 86.75,34.55 86.75,40.517 74.975,50.802 74.975,53.85 72.5,53.85 72.5,47.965 81.25,40.375 81.25,35.5
BL_PWR on Layer 2 "BL_PWR_L03_P008" (solid, remove dead copper, pour order 8): 31.05,52.05 31.05,48.55 31.025,48.525 33.05,48.525 36.275,51.75 36.275,58.975 33.575,58.975 33.575,54.575
NetC103_2 on Layer 2 "NETC103_2_L03_P000" (solid, pour order 0): 86.144,58.954 86.15,58.948 86.15,57.679 80.846,52.375 78.8,52.375 78.8,48.175 81.725,48.175 84.525,50.975 87.425,50.975 87.425,58.954
VDD_2V5 on Layer 1 "VDD_2V5_L02_P001" (solid, pour order 1): 59.075,38.825 78.825,38.825 78.825,41.175 80.9,41.175 80.9,37.325 78.325,34.75 59.075,34.75
VDD_1V8 on Layer 1 "VDD_1V8_L02_P003" (solid, pour order 3): 78.65,41.2 73.973,41.2 70.7,44.473 70.7,44.65 68.748,46.425 45.8,46.425 45.8,39.007 62.393,39.007 78.65,38.947
BL_PWR on Layer 1 "BL_PWR_L02_P007" (solid, remove dead copper, pour order 7): 74.075,48.425 74.15,48.5 74.15,57.05 72.2,59 33.55,59 33.55,56.5 58.575,56.5 60.95,54.125 72.375,54.125 72.775,53.725 72.775,48.4
GND on Top Layer "GND_L01_P009" (solid, remove dead copper, pour order 9): -0.05,0.05 0.05,-0.05 100,-0.05 100,67.95 100.05,68 0,68
BL_PWR on Top Layer "BL_PWR_L01_P005" (solid, remove dead copper, pour order 5): 73.65,28.025 73.65,23.125 72.35,21.825 66.725,21.825 66.35,22.2 66.35,29.5 64,29.5 64,23.279 61.776,21.1 60.675,21.1 60.675,19.225 73.95,19.225 75.15,20.425 75.15,28.75 74.375,28.75
GND on Bottom Layer "GND_L04_P010" (solid, remove dead copper, pour order 10): 0,0.025 100.05,0.025 100,0.075 100,68 0.075,68

## Keep-outs
Keep-Out Layer:
  the board outline again, w0.2

## Other copper
Top Layer:
  rectangle net BL_PWR: 64.2,28.425 66.35,29.5
  rectangle net BL_PWR: 73.925,24.175 75,26.025
  rectangle net BL_A: 77.925,33.92 79.05,34.95
  rectangle net NetC103_2: 84.8,29 85.75,30
  rectangle net MCU_3V3: 79.525,18.25 84.975,21.525
  rectangle net BL_PWR: 73.3,48.425 75.025,53.875
  rectangle net BL_PWR: 86.075,35.35 86.525,37.3
  rectangle net BL_PWR: 31.125,48.525 32.6,49.125
  rectangle net BL_PWR: 40.975,18.1 42.475,20.091
  rectangle net LCD_DVDD: 61.8,3.95 62.3,5.5
  rectangle net VDD_3V3: 83.55,50.2 84.5,50.85
  rectangle net VDD_3V3: 62.5,44 64.35,46.975
  rectangle net VDD_3V3: 62.15,12.975 63.075,13.975
  rectangle net VDD_2V5: 79.275,37.5 81.225,40.95
  rectangle net NetC103_2: 86.144,57.591 87.425,58.954
  rectangle net NetC103_2: 79.65,50.995 80.05,52.8
  rectangle net NetC103_2: 78.85,47.651 79.786,48.575
  rectangle net VDD_1V8: 74.425,38.875 78.8,40.65
  rectangle net NetC109_2: 82.15,58.865 82.837,61.525
  rectangle net NetC108_2: 84.124,57.825 84.859,61.6
  rectangle net NetC17_2: 40.575,23 41,24.33
  rectangle net NetC17_2: 42.275,21.65 42.975,22.575
  rectangle net DDR_1V35: 26.9,45.575 32.425,46.5
  rectangle net DDR_1V35: 26.9,45.8 28.85,48.45
  rectangle net VDD_1V0: 45.225,19.525 46.25,27.387
  pour cut-out: 26.768,44.25 33.8,44.25 33.8,31.675 26.668,31.675
  pour cut-out: 39.637,28.45 55.5,28.45 55.5,44.325 39.663,44.325
Layer 1:
  rectangle net BL_PWR: 73.275,48.425 74.075,53.875
  region net VDD_2V5: 80.3,40.95 79.275,40.95 79.275,37.875 80.3,37.875
  rectangle net VDD_2V5: 59.35,35.75 60.375,38.825
  rectangle net NetC17_2: 42.275,21.65 42.7,22.575
  rectangle net NetC17_2: 40.575,23.4 41,24.33
  rectangle net VDD_1V0: 45.55,23.475 46.425,32.275
Layer 2:
  rectangle net BL_PWR: 60.675,19.25 62.219,20.925
  rectangle net BL_PWR: 65.274,28.426 66.349,29.476
  rectangle net BL_PWR: 85.95,35.52 86.65,36.875
  rectangle net BL_PWR: 73.275,48.425 74.025,53.875
  rectangle net BL_A: 77.952,33.902 79.027,34.953
  rectangle net MCU_3V3: 79.525,19.65 80.65,20.7
  rectangle net NetC103_2: 84.8,29 85.75,30.025
  rectangle net VDD_3V3: 62.15,13 63.125,14.15
  rectangle net BL_A: 66.35,11.675 67.425,13
  rectangle net VDD_3V3: 83.55,50.4 84.5,50.85
  rectangle net VDD_3V3: 62.6,44.075 63.575,46.875
  rectangle net VDD_3V3: 60.5,32.675 61.65,34.125
  rectangle net VDD_2V5: 59.35,35.4 60.375,38.825
  rectangle net NetC103_2: 86.144,57.591 87.425,58.954
  rectangle net DDR_1V35: 39.285,45.125 40.225,47.15
  rectangle net DDR_1V35: 27.2,45.575 29.75,46.5
Bottom Layer:
  rectangle net BL_A: 66.35,11.65 67.425,12.775
  rectangle net LCD_DVDD: 61.8,3.95 62.3,5.5
  rectangle net DDR_1V35: 39.285,45.35 40.225,47.15
  rectangle net DDR_1V35: 27.25,44.475 29.725,46.5

## Silkscreen, mask and mechanical layers (free items; w line width, h text height)
Top Overlay:
  text "V1 2026" at 1.804,60.629 h1.2
Top Solder:
  lines w0.7: 1,1 1,4 ; 2,1 2,4 ; 3,1 3,4 ; 4,1 4,4
  lines w3: 21.05,16 90.55,16 90.55,55.775 21.05,55.775 21.05,16